# Altium PCB GPSDO.PcbDoc
Units mil, origin at the board's own origin, x right, y up, seen from the top; angles counter-clockwise.
Board outline 1528 x 1869 mil, 2 copper layers (Top Layer, Bottom Layer), stack 12.8 mil thick; 90 components, 59 nets, 321 pads, 180 vias.
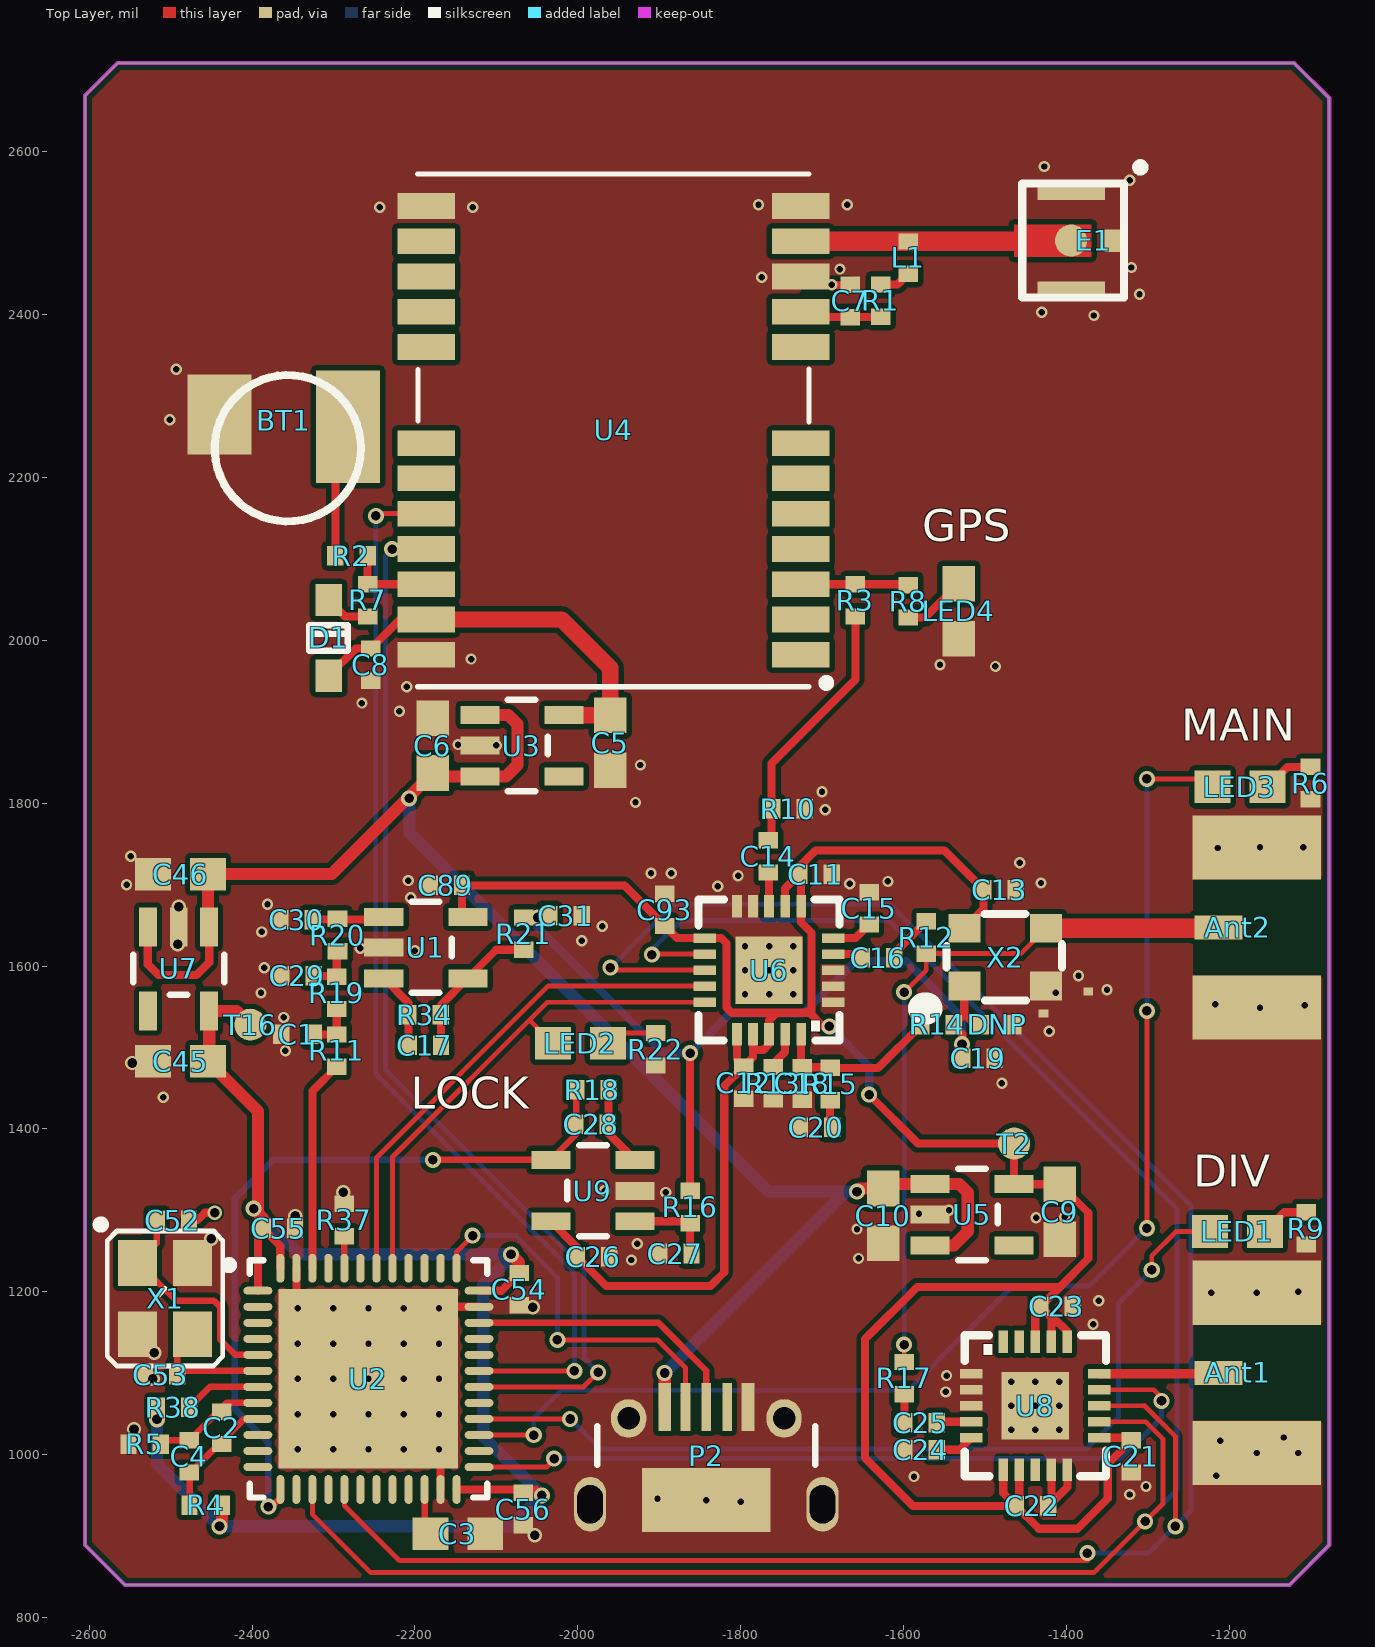
[diagram p0: Top Layer view]
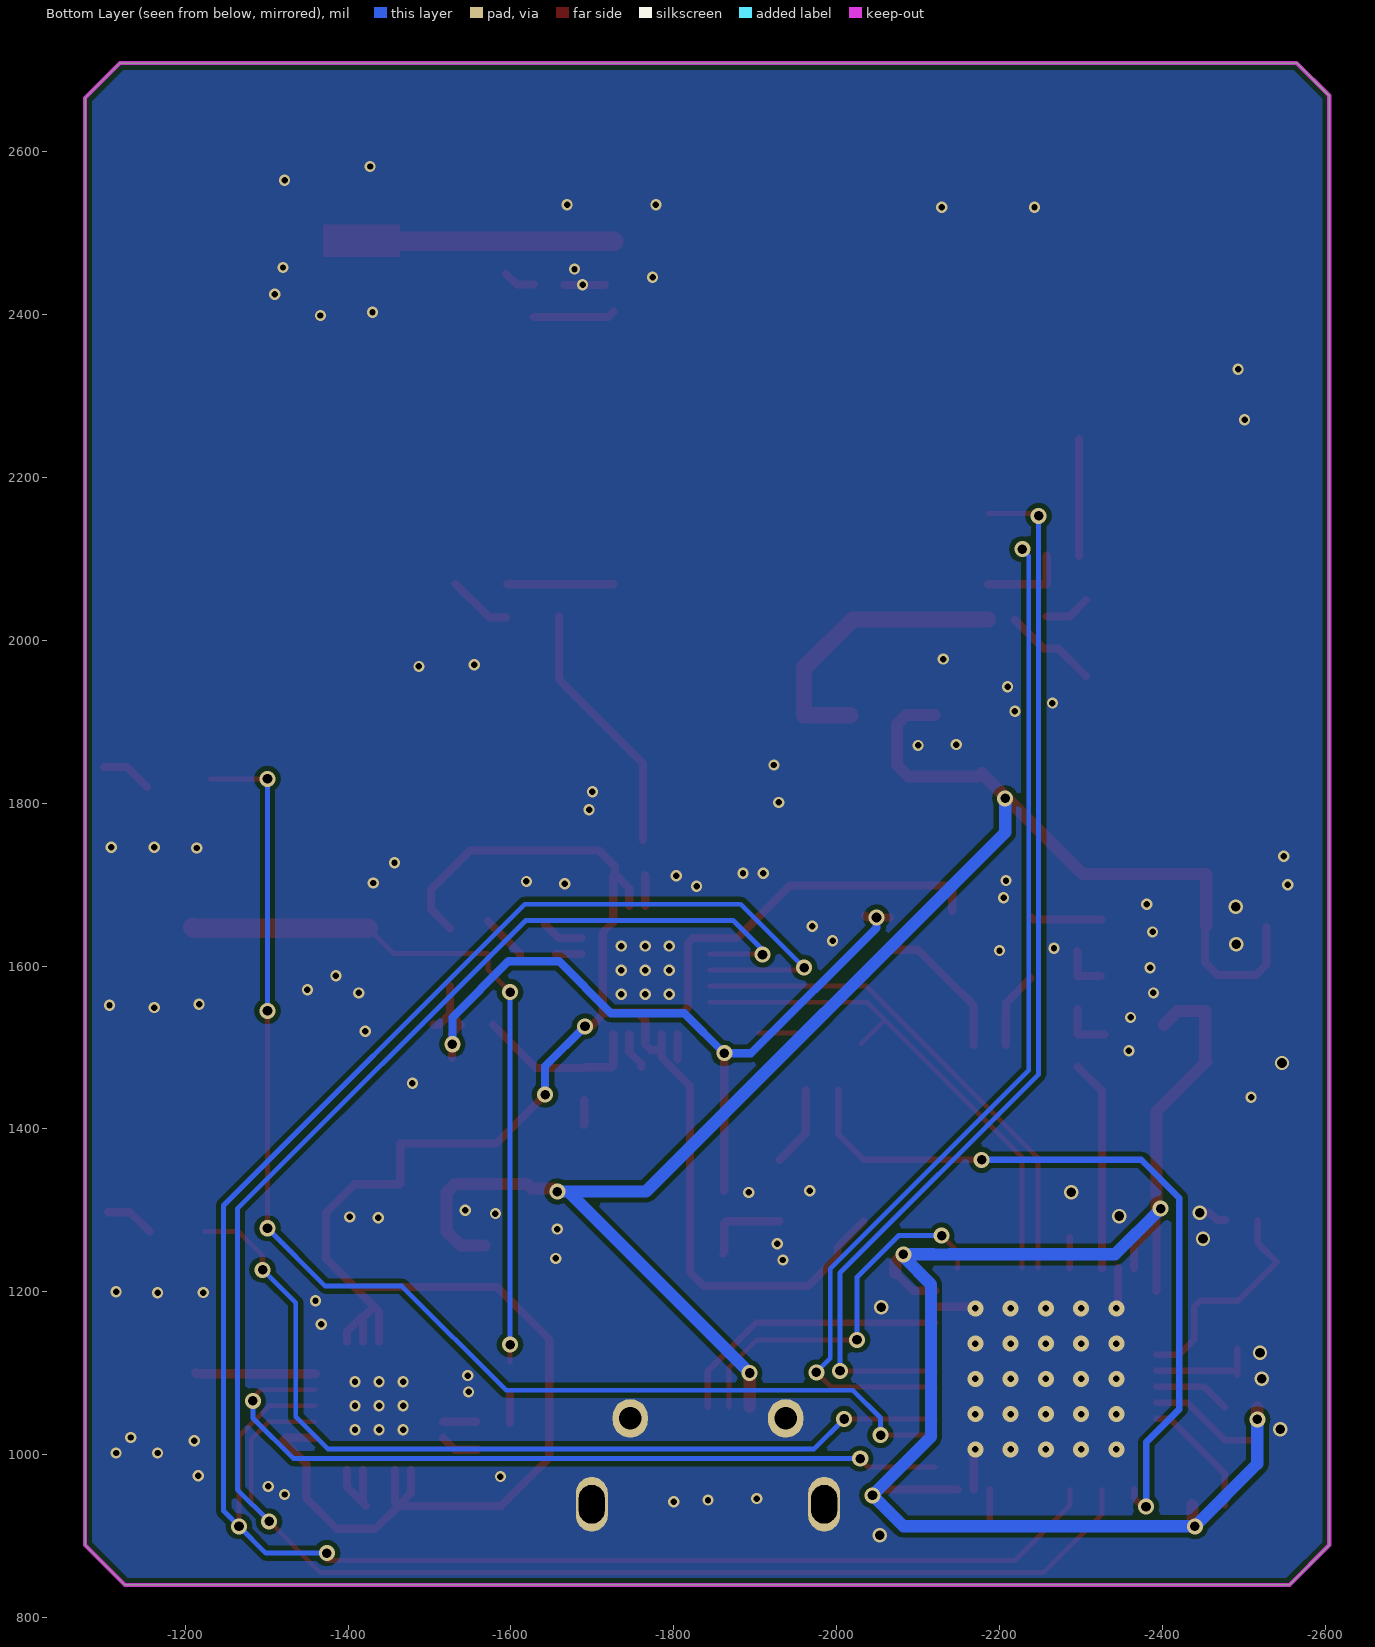
[diagram p1: Bottom Layer view, seen from below]

## Layer stack, top to bottom
Top Solder: solder mask 0.4, Solder Resist, Dk 3.5
Top Layer: signal copper 1.4
Dielectric 1: core 10, FR-4, Dk 4.2
Bottom Layer: signal copper 1.4
Bottom Solder: solder mask 0.4, Solder Resist, Dk 3.5

## Board outline
-2605,889 -2605,2669 -2565,2709 -1120,2709 -1077,2666 -1077,889 -1126,840 -2556,840

## Design rules (kind name [scope] priority, off if disabled: settings)
Clearance Clearance_1 [(InNamedPolygon('Bottom Layer-No Net')) vs Not InNet('GND')] p1: gap=15 ignorepadtopadclearanceinfootprint=FALSE except(0: Arc-Hole Track-Hole SMDPad-Hole THPad-Hole Via-Hole Fill-Hole Poly-Hole Region-Hole Text-Hole)
Clearance [All] p2: gap=6 ignorepadtopadclearanceinfootprint=FALSE
DiffPairsRouting [All] p1: maxlimit=10 minlimit=10 mostfreqgap=10 toplayer_minwidth=5.98 toplayer_maxwidth=15 toplayer_prefwidth=15 bottomlayer_minwidth=5.98 bottomlayer_maxwidth=15 bottomlayer_prefwidth=15 maxuncoupledlength=500
MinimumSolderMaskSliver [All] p1 off: minsoldermaskwidth=10
PlaneClearance [All] p1: clearance=10
PlaneConnect [All] p1: planeconnectstyle=Direct reliefexpansion=20 reliefentries=4 reliefconductorwidth=10 reliefairgap=10
PolygonConnect [All] p1: connectstyle=Direct reliefconductorwidth=10 reliefentries=4 polygonreliefangle="90 Angle" airgapwidth=10
RoomDefinition PLL [InComponentClass('PLL')] p1 off: confinementstyle=ConfineIn formatcopy=TRUE lockcomponents=FALSE outline -5605,-2240 -3605,-2240 -3605,-1240 -5605,-1240
RoomDefinition GPS [InComponentClass('GPS')] p2 off: confinementstyle=ConfineIn formatcopy=TRUE lockcomponents=FALSE outline -1032,897 -146,897 -146,1682 -1032,1682
RoomDefinition MCU [InComponentClass('MCU')] p3 off: confinementstyle=ConfineIn formatcopy=TRUE lockcomponents=FALSE outline -595,900 1750,900 1750,1140 -595,1140
RoutingVias [All] p1: holewidth=12 width=20 viastyle="Through Hole" minholewidth=11.81 minwidth=19.68 maxholewidth=28 maxwidth=50
SilkToBoardRegionClearance [All] p1 off:
SilkToSilkClearance [All] p1 off: silktosilkclearance=10
SilkToSolderMaskClearance [IsPad] p1 off: minsilkscreentomaskgap=10 clearancetoexposedcopper=TRUE
SolderMaskExpansion [All] p1: expansion=4
Width [All] p1: maxlimit=60 minlimit=6 preferedwidth=6
23 further rules are at their usual default settings.

## Classes and differential pairs
component class MCU: C2 C3 C4 C26 C27 C28 C29 C30 C31 C45 C46 C52 C53 C54 C55 C56 C? LED1 LED3 LED4 P2 R4 R5 R6 R9 R16 R18 R19 R20 R21 R22 R28 R37 R38 R? T16 U2 U7 U9 X1
component class GPS: BT1 C5 C6 C7 C8 D1 E1 L1 LED4 R1 R2 R3 R7 R8 U3 U4
component class PLL: Ant1 Ant2 C9 C10 C11 C12 C13 C14 C15 C16 C18 C19 C20 C21 C22 C23 C24 C25 C26 C27 C28 C93 DNP R10 R12 R13 R14 R15 R16 R17 R18 T2 U5 U6 U8 U9 X2

## Components (designator, comment, footprint, x,y, rotation, side; value= is the part's Value field where it differs from the comment)
Ant1 "Antenna" SMA-2 -1166,1002 r90 top
Ant2 "Antenna" SMA-2 -1166,1549 r90 top
BT1 "Battery" XH414H-IV01E -2356,2236 r270 top
C1 "Cap" 0402 -2344,1516 r180 top value=DNC
C2 "Cap" 0402 -2437,1033 r270 top value=0.1uF
C3 "Cap" 0603 -2147,903 r180 top value=4.7uF
C4 "Cap" 0402 -2477,998 r270 top value=0.1uF
C5 "4.7uF" 0603 -1960,1874 r90 top
C6 "4.7uF" 0603 -2178,1871 r270 top
C7 "100pF" 0402 -1665,2417 r270 top
C8 "0.1uF" 0402 -2254,1970 r90 top
C9 "4.7uF" 0603 -1408,1298 r90 top
C10 "4.7uF" 0603 -1625,1293 r90 top
C11 "100pF" 0402 -1708,1713 r0 top
C12 "100pF" 0402 -1796,1457 r270 top
C13 "100pF" 0402 -1482,1694 r0 top
C14 "100pF" 0402 -1766,1735 r270 top
C15 "100pF" 0402 -1642,1671 r270 top
C16 "100pF" 0402 -1631,1610 r180 top
C17 "Cap" 0402 -2188,1503 r0 top value=0.1uF
C18 "100pF" 0402 -1724,1456 r270 top
C19 "100pF" 0402 -1508,1487 r0 top
C20 "100pF" 0402 -1707,1402 r180 top
C21 "100pF" 0402 -1320,998 r270 top
C22 "100pF" 0402 -1442,937 r0 top
C23 "100pF" 0402 -1412,1182 r0 top
C24 "100pF" 0402 -1579,1006 r0 top
C25 "100pF" 0402 -1579,1039 r0 top
C26 "Cap" 0402 -1981,1243 r180 top value=0.1uF
C27 "Cap" 0402 -1880,1247 r180 top value=DNC
C28 "Cap" 0402 -1983,1406 r180 top value=0.1uF
C29 "Cap" 0402 -2344,1588 r180 top value=DNC
C30 "Cap" 0402 -2345,1657 r180 top value=DNC
C31 "Cap" 0402 -2015,1662 r0 top value=DNC
C45 "4.7uF" 0603 -2488,1483 r0 top
C46 "4.7uF" 0603 -2488,1713 r0 top
C52 "Cap" 0402 -2497,1288 r180 top value=20pF
C53 "Cap" 0402 -2512,1098 r0 top value=20pF
C54 "Cap" 0402 -2072,1203 r90 top value=0.1uF
C55 "Cap" 0402 -2367,1278 r180 top value=0.1uF
C56 "Cap" 0402 -2067,933 r90 top value=0.1uF
C89 "Cap" 0402 -2162,1699 r0 top value=0.1uF
C93 "0.1uF" 0402 -1893,1669 r90 top
D1 "Diode" LC-SOD-323 -2306,2003 r270 top
DNP "DNC" 0402 -1485,1528 r0 top value=0Ohm
E1 "Antenna" IPEX -1394,2491 r270 top
L1 "10nH" 0402 -1594,2470 r90 top value=10mH
LED1 "LED0" 0603 -1190,1274 r0 top
LED2 "LED0" 0603 -1997,1505 r0 top
LED3 "LED0" 0603 -1187,1820 r0 top
LED4 "LED0" 0603 -1532,2036 r270 top
P2 "SWD_MicroUSB" MICRO-YZX -1842,828 r0 top
R1 "33R" 0402 -1628,2417 r90 top
R2 "" 0402 -2278,2104 r0 top value=0R
R3 "50R" 0402 -1659,2049 r90 top
R4 "0R/FB" 0402 -2457,938 r0 top
R5 "0R/FB" 0402 -2532,1013 r0 top
R6 "10k" 0402 -1100,1825 r270 top value=0Ohm
R7 "" 0402 -2258,2049 r90 top value=0R
R8 "" 0402 -1594,2048 r270 top value=0R
R9 "10k" 0402 -1105,1278 r270 top value=0Ohm
R10 "50R" 0402 -1741,1793 r180 top
R11 "Res2" 0402 -2296,1496.32 r270 top value=10k
R12 "1k" 0402 -1572,1635 r90 top
R13 "4.7k" 0402 -1760,1456 r90 top
R14 "10k" 0402 -1558,1528 r180 top
R15 "10k" 0402 -1690,1455 r90 top
R16 "Res2" 0402 -1862,1304 r90 top value=10k
R17 "1k" 0402 -1599,1094 r270 top
R18 "Res2" 0402 -1982,1448 r0 top value=10k
R19 "Res2" 0402 -2296,1567.32 r270 top value=10k
R20 "Res2" 0402 -2295,1638.32 r270 top value=10k
R21 "Res2" 0402 -2066,1640 r270 top value=10k
R22 "10k" 0402 -1904,1498 r270 top value=0Ohm
R34 "Res2" 0402 -2188,1540 r180 top value=10k
R37 "Res2" 0402 -2287,1288 r90 top value=10k
R38 "Res2" 0402 -2497,1058 r0 top value=10k
T2 "TestPad" "TestPad - 1mm" -1464,1382 r270 top
T16 "TestPad" "TestPad - 1mm" -2402,1528 r180 top
U1 "OP-SOT23" SOT23-5 -2187,1623 r270 top
U2 "STM32F401CCU6" STM-UFQFPN48_N -2257,1093 r0 top
U3 "LP5907" SOT23-5 -2069,1871 r270 top
U4 "NEO-M8" NEO -1956,2258 r0 top
U5 "LP5907" SOT23-5 -1516,1295 r270 top
U6 "ADF4001" ADF4001 -1765,1595 r180 top
U7 "LP5907" SOT23-5 -2490,1597 r180 top
U8 "ADF4001" ADF4001 -1438,1060 r0 top
U9 "OP-SOT23" SOT23-5 -1981,1324 r90 top
X1 "24.000 KHz 3.2x2.5mm 8-10pf" OSCILLATOR-3.2X2.5 -2507,1192 r270 top
X2 "OSC_40M" TXC_7Q -1475,1611 r0 top

## Footprints (in the part's own frame and the unit in brackets; to place one, negate y for a bottom-side part, rotate by r counter-clockwise, add the part's x,y. Pads: shape width x height; smd on the part's side, far side on the other; paste and mask are expansions set on the pad)
0402 [mil] "0402-RES"
  rect 20x24 smd: 1(-19.68,0) 2(20,0)
0603 [mil] "0603-RES"
  rect 44x40 smd: 1(-33.46,0) 2(34,0)
ADF4001 [mm]
  rect 2.1x2.1 smd: 0(0,0)
  rect 0.7x0.3 smd: 1(-2,1) 2(-2,0.5) 3(-2,0) 4(-2,-0.5) 5(-2,-1) 11(2,-1) 12(2,-0.5) 13(2,0) 14(2,0.5) 15(2,1)
  rect 0.3x0.7 smd: 6(-1,-2) 7(-0.5,-2) 8(0,-2) 9(0.5,-2) 10(1,-2) 16(1,2) 17(0.5,2) 18(0,2) 19(-0.5,2) 20(-1,2)
  silkscreen extent -2.2,-2.2 2.2,2.2, body extent -2,-2 2,2, height 0.65
IPEX [mm]
  round 1 smd: 1(0,0)
  rect 0.5x2.1 smd: 2(-1.524,0) 2(1.524,0)
  rect 0.7x0.7 smd: 2(0,1.397)
  Top Layer region: -0.508,-1.778 0.508,-1.778 0.508,0.635 -0.508,0.635
  silkscreen extent -2.41,-1.52 1.78,2.29
LC-SOD-323 [mm]
  rect 1x0.83 smd: 1(1.18,0) 2(-1.18,0)
  silkscreen extent -0.4,-0.6 0.4,0.6, body extent -1.35,-0.62 1.35,0.63, height 1.1
MICRO-YZX [mm]
  rect 0.4x1.5 smd: 1(-1.3,5.85) 5(1.3,5.85)
  rect 0.3x1.5 smd: 2(-0.65,5.85) 3(0,5.85) 4(0.65,5.85)
  oval 1x1.7 hole 0.8 slot 1.2 at 90 deg: 5(-3.625,2.82) 5(3.625,2.82)
  oval 1.1x1.2 hole 0.7: 5(-2.425,5.5) 5(2.425,5.5)
  rect 4x2 smd: 5(0,2.95)
  silkscreen extent -3.4,4.05 3.4,5.25, body extent -4.02,0.33 3.98,5.93, height 2.6
NEO [mm] "u-blox NEO GNSS module"
  rect 1.8x0.8 smd paste-0.1: 1(5.842,-7) 2(5.842,-5.9) 3(5.842,-4.8) 4(5.842,-3.7) 5(5.842,-2.6) 6(5.842,-1.5) 7(5.842,-0.4) 8(5.842,2.6) 9(5.842,3.7) 10(5.842,4.8) 11(5.842,5.9) 12(5.842,7) 13(-5.842,7) 14(-5.842,5.9) 15(-5.842,4.8) 16(-5.842,3.7) 17(-5.842,2.6) 18(-5.842,-0.4) 19(-5.842,-1.5) 20(-5.842,-2.6) 21(-5.842,-3.7) 22(-5.842,-4.8) 23(-5.842,-5.9) 24(-5.842,-7)
  silkscreen extent -6.11,-8 6.69,8, body extent -6.1,-8 6.1,8, height 2.28
OSCILLATOR-3.2X2.5 [mil] "OSCILLATOR-3.2X2.5"
  rect 56x48 smd: 1(-43.31,-33.46) 2(44,-33.46) 3(44,34) 4(-43.31,34)
  silkscreen extent -95,-83 83,71
SMA-2 [mm]
  rect 0.75x1.5 smd: 1(2.5,1.2)
  rect 2x4 smd: GND(0,0) GND(5,0)
  Top Layer pour cut-out: 1,2 4,2 4,-2 1,-2
SOT23-5 [mil] "SOT23-5"
  rect 22x48 smd: 1(-37.4,-51.19) 2(0,-51.19) 3(38,-51.19) 4(38,52) 5(-37.4,52)
  silkscreen extent -56,-17 56,32
STM-UFQFPN48_N [mm] "QFN, 48-Leads, Body 7.1x7.1mm, Pitch 0.5mm, Thermal Pad 5.6x5.6mm, IPC Medium Density"
  oval 0.9x0.25 smd: 1(-3.45,2.75) 2(-3.45,2.25) 3(-3.45,1.75) 4(-3.45,1.25) 5(-3.45,0.75) 6(-3.45,0.25) 7(-3.45,-0.25) 8(-3.45,-0.75) 9(-3.45,-1.25) 10(-3.45,-1.75) 11(-3.45,-2.25) 12(-3.45,-2.75) 25(3.45,-2.75) 26(3.45,-2.25) 27(3.45,-1.75) 28(3.45,-1.25) 29(3.45,-0.75) 30(3.45,-0.25) 31(3.45,0.25) 32(3.45,0.75) 33(3.45,1.25) 34(3.45,1.75) 35(3.45,2.25) 36(3.45,2.75)
  oval 0.25x0.9 smd: 13(-2.75,-3.45) 14(-2.25,-3.45) 15(-1.75,-3.45) 16(-1.25,-3.45) 17(-0.75,-3.45) 18(-0.25,-3.45) 19(0.25,-3.45) 20(0.75,-3.45) 21(1.25,-3.45) 22(1.75,-3.45) 23(2.25,-3.45) 24(2.75,-3.45) 37(2.75,3.45) 38(2.25,3.45) 39(1.75,3.45) 40(1.25,3.45) 41(0.75,3.45) 42(0.25,3.45) 43(-0.25,3.45) 44(-0.75,3.45) 45(-1.25,3.45) 46(-1.75,3.45) 47(-2.25,3.45) 48(-2.75,3.45)
  rect 5.6x5.6 smd: 49(0,0)
  silkscreen extent -4.47,-3.7 3.7,3.7, body extent -3.55,-3.55 3.55,3.55, height 0.6
"TestPad - 1mm" [mm]
  round 1 smd: 1(0,0)
TXC_7Q [mm]
  rect 1x0.9 smd: 1(-1.275,-0.9) 2(1.275,-0.9) 3(1.275,0.9) 4(-1.275,0.9)
  silkscreen extent -2.52,-1.6 1.78,1.35
XH414H-IV01E [mm]
  rect 3.5x2 smd: 1(-0.671,1.873)
  rect 2.5x2 smd: 2(-1.052,-2.127)
  silkscreen extent -2.28,-2.28 2.28,2.28, body extent -2.42,-2.4 2.36,2.4, height 2

## Part data
BT1: "Multicell Battery", LatestRevisionDate=17-Jul-2002, LatestRevisionNote="Re-released for DXP Platform.", PackageDescription="Battery; 2 Leads", PackageReference=BAT-2, Published=24-Mar-1999, Publisher="Altium Limited"
C1 C2 C3 C4 C17 C26 C27 C28 C29 C30 C31 C52 C53 C54 C55 C56 C89: "Capacitor", LatestRevisionDate=17-Jul-2002, LatestRevisionNote="Re-released for DXP Platform.", PackageDescription="Radial Cap, Thru-Hole; 2 Leads; 0.3 in Pin Spacing", PackageReference=RAD-0.3, Published=8-Jun-2000, Publisher="Altium Limited"
C5 C6 C7 C8 C9 C10 C11 C12 C13 C14 C15 C16 C18 C19 C20 C21 C22 C23 C24 C25 C45 C46: library part Cap, "Capacitor", LatestRevisionDate=17-Jul-2002, LatestRevisionNote="Re-released for DXP Platform.", PackageDescription="Radial Cap, Thru-Hole; 2 Leads; 0.3 in Pin Spacing", PackageReference=RAD-0.3, Published=8-Jun-2000, Publisher="Altium Limited"
C93: library part CAP0402-CAP, "<b>Capacitor</b> / Standard 0603 ceramic capacitor, and 0.1\" leaded capacitor.", PARTNO=CC0402ZRY5V7BB104
D1: "Default Diode", Code_JEDEC=DO-214-AB, LatestRevisionDate=17-Jul-2002, LatestRevisionNote="Re-released for DXP Platform.", PackageDescription="DO-214-AB/SMC; 2 C-Bend Leads; Body 7.9 x 5.9 mm, inc. leads (LxW)", PackageReference=SMC, PackageVersion=Sep-1996, Published=8-Jun-2000, Publisher="Altium Limited"
DNP R1 R2 R3 R4 R5 R6 R7 R8 R9 R10 R12 R13 R14 R15 R17 R22: library part Res2, "Resistor", LatestRevisionDate=17-Jul-2002, LatestRevisionNote="Re-released for DXP Platform.", PackageDescription="Axial Device, Thru-Hole; 2 Leads; 0.4 in Pin Spacing", PackageReference=AXIAL-0.4, Published=8-Jun-2000, Publisher="Altium Limited"
E1: "Generic Antenna", LatestRevisionDate=17-Jul-2002, LatestRevisionNote="Re-released for DXP Platform.", PackageReference=PIN1, Published=24-Mar-1999, Publisher="Altium Limited"
L1: library part Inductor, "Inductor", Code_IEC=1005, Code_JEITA=0402, LatestRevisionDate=29-May-2009, LatestRevisionNote="IPC-7351 Footprint Added.", PackageDescription="Chip Inductor", PackageReference=0402-A, Published=8-Jun-2000, Publisher="Altium Limited"
LED1 LED2 LED3 LED4: "Typical INFRARED GaAs LED", LatestRevisionDate=08-Jul-2005, LatestRevisionNote="Mech Layer 1 removed.", PackageDescription="LED; 2 Leads", PackageReference=LED-0, Published=8-Jun-2000, Publisher="Altium Limited"
P2: "Connector SMD USB Micro Type B middle mount", Manufacturer 1="Molex Inc", Package / Case=SMD, Supplier Part Number 1=WM17142CT-ND, SCDType=undef, Supplier 1=Digi-Key
R11 R16 R18 R19 R20 R21 R34 R37 R38: "Resistor", LatestRevisionDate=17-Jul-2002, LatestRevisionNote="Re-released for DXP Platform.", PackageDescription="Axial Device, Thru-Hole; 2 Leads; 0.4 in Pin Spacing", PackageReference=AXIAL-0.4, Published=8-Jun-2000, Publisher="Altium Limited"
U2: "ARM Cortex-M4 32-bit MCU+FPU, 105 DMIPS, 256 kB Flash, 64 kB Internal RAM, 36 I/Os, 48-pin UFQFPN, -40 to 85 degC, Tray", I/Os (High Current)=36, Manufacturer=STMicroelectronics, Operating Frequency(F) (Processor speed) (MHz)=84, Supplier Part Number 1=19X6217, Supply Voltage(Vcc) max (V)=3.6, Supply Voltage(Vcc) min (V)=1.8, ComponentLink1Description="Manufacturer URL", ComponentLink1URL=http://www.st.com/web/en/home.html, ComponentLink2Description=Datasheet, ComponentLink2URL=http://www.st.com/st-web-ui/static/active/en/resource/technical/document/data_brief/DM00071938.pdf, ComponentLink3Description="Package Specification", ComponentLink3URL=http://www.st.com/st-web-ui/static/active/en/resource/technical/document/data_brief/DM00071938.pdf, Core="ARM Cortex-M4", DatasheetVersion="Rev. 1", FLASH Size (Prog) (kB)=256, Internal RAM Size (kB)=64, Mounting Technology="Surface Mount", PackageDescription="48-Pin Ultra Thin Fine Pitch Quad Flat No-Lead, 7 x 7 x 0.6 mm Body, 0.5 mm Pitch, Exposed Pad", PackageReference=UFQFPN48, PackageVersion="Rev. 1, 04/2013", Packing=Tray, PartNumber=STM32F401CCU6, Supplier 1=Newark, Supplier 2=Mouser, Supplier Part Number 2=511-STM32F401CCU6
U4: library part NEO, "u-blox NEO GNSS module", Manufacturer=u-blox, Part Description="u-blox GNSS module"
X1: library part OSCILLATOR-3.2X2.5, "Crystal Oscillator in 3.2x2.5 SMD"

## Free pads (board coordinates)
  rect 11.81x9.84 smd: 2(-1162,1549) 3(-1107,1552) 4(-1217,1553) 5(-1428,1542) 6(-1373,1569)

## Via types
v1: diameter 13.78, hole 7.87, Top Layer to Bottom Layer, 107 vias
v2: diameter 19.68, hole 11.81, Top Layer to Bottom Layer, 36 vias
v3: diameter 19.68, hole 7.87, Top Layer to Bottom Layer, 25 vias
v4: diameter 17.72, hole 11.81, Top Layer to Bottom Layer, 12 vias

## Nets (pads, with @x,y where several pads share a name; then routed paths per layer and width w, separated by ;. In a path a pad name is that pad's centre, name@x,y a point inside that pad or via, vN(x,y) a via of type N, cw(c..) or ccw(c..) an arc to the next point about the centre after c; other vN are vias at no path point)
3.3D: C45.2 C54.2 C55.2 C56.2 R4.2 R38.1 T16.1 U2.1 U2.24 U2.36 U2.48 U7.5 | length 2001.2
  Top Layer w10: U2.1 v2@-2392.83,1296.83 ; C55.2 -2365.27,1256.27 U2.48 ; U2.24 -2051.17,957.17 v2(-2044,950) ; U2.36 -2093.73,1201.27 C54.2
  Top Layer w15: v2(-2516.68,1043.32) R38.1 ; C45.2 -2392.83,1421.83 v2@-2392.83,1296.83 ; C45.2@-2452.6,1484.4 U7.5 -2419,1545 T16.1 ; v2(-2440,912) -2437,915 R4.2 ; v2(-2398,1302) v2@-2392.83,1296.83 ; C55.2 -2387,1291 v2@-2392.83,1296.83 ; v2(-2082,1246) -2072,1236 C54.2
  Bottom Layer w15: v2(-2516.68,1043.32) -2516.68,988.68 v2(-2440,912) -2082,912 v2(-2044,950) -2116,1022 -2116,1209 -2082,1243 v2(-2082,1246) -2118.99,1246 -2119.33,1245.66 -2138.67,1245.66 -2139.01,1246 -2342,1246 v2(-2398,1302)
3.3GPS: C5.2 C8.2 D1.1 U3.5 U4.23 | length 481.7
  Top Layer w10: D1.1 -2272.54,1990 C8.2 U4.23@-2218.28,2025.72
  Top Layer w20: U4.23 -2019.72,2025.72 -1960,1966 C5.2 U3.5@-2016.6,1908
3.3PLL: C9.2 C11.1 C12.1 C13.1 C21.1 C22.1 C23.1 C26.2 C89.2 C93.1 T2.1 U1.5 U5.5 U6.6 U6.7 U6.11 U6.16 U6.17 U6.18 U8.6 U8.7 U8.11 U8.16 U8.17 U8.18 U9.5 X2.4 | length 3516.3
  Top Layer w10: U1.5@-2142,1667.4 C89.2 -1942.68,1699 C93.1 -1878.06,1634.37 U6.11 -1823.71,1634.37 -1817.34,1628 -1817.34,1549.11 -1810.89,1542.66 -1755.34,1542.66 ; U9.5 -2001,1254.6 C26.2 -1965,1207 -1837,1207 -1820,1224 -1820,1452.68 C12.1 -1784.68,1488 U6.17 ; C12.1@-1804.37,1485.06 U6.16 ; -1783.68,1497 -1772,1497 -1765,1504 U6.18 -1765,1533 -1755.34,1542.66 ; U6.7 -1745.32,1695.37 C11.1 ; v2(-1691,1526) -1698.44,1526 -1717.11,1544.66 ; v2(-1642,1442) -1582,1382 T2.1 U5.5 -1463.6,1332 C9.2 -1373,1297 -1373,1240.68 -1407.69,1206 ; X2.4 -1501.69,1669.95 C13.1 -1549.68,1742 -1708,1742 -1727.68,1722.32 C11.1 ; U8.6 -1477.37,952.69 C22.1 ; C22.1@-1457.69,941 U8.7 ; U8.18 -1438,1175.68 C23.1 ; U8.17 -1418.31,1168.63 C23.1 ; -1416.19,1168.63 -1398.63,1151.07 U8.16 ; U8.11 C21.1@-1322.94,1020.63 ; C21.1 -1349,988.68 -1349,946 -1386,909 -1433.69,909 C22.1 ; -1755.34,1542.66 -1719.11,1542.66 -1717.11,1544.66 ; C11.1 -1725.63,1710.94 U6.6 -1725.63,1653.86 -1712.66,1640.89 -1712.66,1544.66 -1717.11,1544.66 ; C22.1 -1588,937 -1647,996 -1647,1142 -1583,1206 -1407.69,1206 ; C23.1 -1407.69,1206
  Bottom Layer w10: v2(-1691,1526) -1642,1477 v2(-1642,1442)
5V: C6.2 C10.2 C46.2 P2.1 U3.1 U3.3 U5.1 U5.3 U7.1 U7.3 | length 2151.7
  Top Layer w10: U7.3 -2528,1602 -2515,1589 -2468,1589 -2452.6,1604.4 U7.1
  Top Layer w15: U7.1@-2454,1649.59 C46.2 -2302,1713 C6.2 ; C6.2@-2174,1833 U3.3 -2088,1833 -2074,1847 -2074,1897 -2085.4,1908.4 U3.1 ; P2.1 v2(-1893.18,1100.18) ; v2(-1657,1323) -1653,1327 C10.2 -1619.6,1332.4 U5.1 -1531.4,1332.4 -1521,1322 -1521,1274 -1538,1257 U5.3
  Bottom Layer w15: v2(-2207,1806) -2207,1764 -1766,1323 -1670.36,1323 ; v2(-1893.18,1100.18) -1670.36,1323 ; v2(-1657,1323) -1670.36,1323
AGND: C2.1 C4.1 R5.2 U2.8 | length 133.5
  Top Layer w8: R5.2@-2507.32,1017.68 C4.1 -2431.21,1063.47 U2.8
CLOCK40M: Ant2.1 R12.1 R17.1 X2.3 | length 888.9
  Top Layer w6: R17.1 v2(-1599,1135) ; v2(-1599,1568) -1572,1595 R12.1 -1455.92,1615.32 X2.3
  Top Layer w24: X2.3 -1210.24,1646.43 Ant2.1@-1209.24,1647.43
  Bottom Layer w6: v2(-1599,1135) v2(-1599,1568)
GND: Ant1.GND Ant2.GND BT1.2 C1.2 C3.1 C5.1 C6.1 C7.1 C8.1 C9.1 C10.1 C11.2 C12.2 C13.2 C15.1 C18.2 C19.2 C20.2 C21.2 C22.2 C23.2 C24.1 C26.1 C27.2 C29.2 C30.2 C31.2 C45.1 C46.1 C52.1 C53.1 C54.1 C55.1 C56.1 C89.1 C93.2 DNP.2 E1.2 LED4.2 P2.5 pad.2 pad.3 pad.4 pad.5 pad.6 R5.1 R6.2 R9.2 R10.1 R13.1 R22.2 R37.2 U1.2 U2.23 U2.35 U2.47 U2.49 U3.2 U4.10 U4.12 U4.13 U4.24 U5.2 U6.0 U6.1 U6.2 U6.3 U6.9 U6.10 U7.2 U8.0 U8.1 U8.2 U8.3 U8.9 U8.10 U9.2 X1.2 X1.4 X2.2 | length 322
  Top Layer w10: C52.1 -2467,1288 -2458,1297 v4(-2446,1297) ; U2.49@-2345.58,1181.58 U2.47 ; U2.23 U2.49@-2168.42,1004.42 ; U2.49@-2168.42,1181.58 U2.35 ; U4.10@-1715.71,2436.69 C7.1 ; C22.2 C22.2@-1418.31,940.68 ; U8.9 C22.2@-1418.31,940.68 ; U8.10 -1398.63,960.37 C22.2@-1418.31,940.68
  other v1: -1800,942 -1842,944.14 -1902,946 -1322,951 -1302,961 -1587,973 -1216,974 -1166,1002 -1115,1002 -1211,1017 -1133,1021 -1467.53,1030.47 -1438,1030.47 -1408.47,1030.47 -1467.53,1060 -1438,1060 -1408.47,1060 -1548,1077 -1467.53,1089.53 -1438,1089.53 -1408.47,1089.53 -1547,1097 -1367,1160 -1360,1189 -1222,1199 -1166,1198.85 -1115,1200 -1934,1239 -1655,1241 -1927,1259 -1657,1277 -1437,1291 -1402,1292 -1580.86,1296 -1544,1300 -1892,1322 -1967,1324 -2509,1439 -1479,1456 -2359,1496 -1421,1520 -2361,1537 -1162,1549 -1107,1552 -1217,1553 -1794.53,1565.47 -1765,1565.47 -1735.47,1565.47 -2389,1567 -1413,1567 -1350,1571 -1385,1588 -1794.53,1595 -1765,1595 -1735.47,1595 -2385,1598 -2200,1619 -2267,1622 -1794.53,1624.53 -1765,1624.53 -1735.47,1624.53 -1995,1631 -2388,1642 -1970,1649 -2381,1676 -2205,1684 -1828,1698 -2554,1700 -1666,1701 -1431,1702 -1619,1704 -2208,1705 -1803,1711 -1910,1714 -1885,1714 -1457,1727 -2549,1735 -1214,1745 -1162,1745.85 -1109,1746 -1696,1792 -1929,1801 -1700,1814 -1923,1847 -2100,1871 -2147,1872 -2219,1913 -2265,1923 -2210,1943 -1487,1968 -1555,1970 -2131,1977 -2501,2271 -2493,2333 -1366,2399 -1430,2403 -1310,2425 -1688,2436.69 -1774,2446 -1678,2456 -1320,2458 -2243,2532 -2129,2532 -1778,2535 -1669,2535 -1322,2565 -1427,2582
  other v3: -2343.61,1006.39 -2300.31,1006.39 -2257,1006.39 -2213.69,1006.39 -2170.39,1006.39 -2343.61,1049.69 -2300.31,1049.69 -2257,1049.69 -2213.69,1049.69 -2170.39,1049.69 -2343.61,1093 -2300.31,1093 -2257,1093 -2213.69,1093 -2170.39,1093 -2343.61,1136.31 -2300.31,1136.31 -2257,1136.31 -2213.69,1136.31 -2170.39,1136.31 -2343.61,1179.61 -2300.31,1179.61 -2257,1179.61 -2213.69,1179.61 -2170.39,1179.61
  other v4: -2053,901 -2545,1031 -2522,1093 -2520,1125 -2055,1181 -2450,1265 -2347,1293 -2288,1322 -2547,1481 -2491,1627 -2490,1673
LED: LED3.1 U2.27 | length 1560.3
  Top Layer w6: U2.27 -2121.07,1024 v2(-2054,1024) ; v2(-1301,1278) v2(-1301,1545) ; v2(-1301,1830) LED3.1@-1230.46,1830
  Bottom Layer w6: v2(-2054,1024) -2054,1045 -2020,1079 -1594,1079 -1466,1207 -1372,1207 v2(-1301,1278) ; v2(-1301,1545) v2(-1301,1830)
LED1: LED1.1 U2.28 | length 1115.5
  Top Layer w6: U2.28 v2(-2009.21,1043.79) ; v2(-1295,1227) -1295,1244 -1265,1274 LED1.1
  Bottom Layer w6: v2(-2009.21,1043.79) -1972.43,1007 -1375,1007 -1335.63,1046.37 -1335.63,1186.37 v2(-1295,1227)
NetAnt1_1: Ant1.1 U8.15 | length 146.5
  Top Layer w12: U8.15 -1214.3,1099.37 Ant1.1
NetBT1_1: BT1.1 R2.1 | length 143
  Top Layer w10: R2.1 BT1.1@-2297.68,2247.01
NetC1_1: C1.1 R11.1 R19.2 | length 64.3
  Top Layer w10: C1.1@-2329,1516 R11.1 R19.2
NetC2_2: C2.2 C4.2 R4.1 U2.9 | length 150.4
  Top Layer w8: R4.1 -2476.68,976.86 -2409.76,1043.79 U2.9
NetC3_2: C3.2 U2.22 | length 47.1
  Top Layer w8: C3.2@-2188.1,910.1 U2.22
NetC7_2: C7.2 R1.1 U4.9 | length 100.6
  Top Layer w10: U4.9 -1719.65,2397.31 R1.1
NetC14_1: C14.1 R3.1 R10.2 | length 317.3
  Top Layer w10: C14.1@-1762,1754.68 -1762,1849 -1659,1952 R3.1
NetC14_2: C14.2 U6.8 | length 38.3
  Top Layer w10: U6.8 C14.2@-1765,1712
NetC15_2: C15.2 U6.5 | length 51.1
  Top Layer w10: U6.5 -1658.63,1634.37 C15.2
NetC16_1: C16.1 R12.2 | length 61.3
  Top Layer w10: C16.1 -1611.32,1615.68 R12.2
NetC16_2: C16.2 U6.4 | length 30.6
  Top Layer w10: U6.4 C16.2@-1655.68,1614.68
NetC17_1: C17.1 R34.2 U1.3 | length 94.6
  Top Layer w10: U1.3 -2208,1554.81 R34.2 -2207.68,1539.68 C17.1
NetC17_2: C17.2 R21.2 R34.1 U1.4 | length 179.2
  Top Layer w10: C17.2 -2168,1552 U1.4 -2100,1620 R21.2
NetC18_1: C18.1 R14.2 R15.2 U6.20 | length 209.5
  Top Layer w10: U6.20 -1725.63,1477.31 C18.1 -1690.68,1475.68 R15.2 -1631,1475 R14.2
NetC19_1: C19.1 C31.1 DNP.1 R14.1 R16.2 R21.1 X2.1 | length 1031.5
  Top Layer w10: R21.1 v2(-2049,1659.68) -2037,1659.68 C31.1 ; R16.2 v2(-1862,1493) ; C19.1 -1527.68,1517.37 R14.1 -1525.2,1541.12 ; X2.1 -1525.2,1541.12 ; DNP.1 -1512.08,1528 -1525.2,1541.12
  Bottom Layer w10: v2(-2049,1659.68) -2049,1647 -1895,1493 v2(-1862,1493) -1813,1542 -1723,1542 -1659,1606 -1597,1606 -1528,1537 v2(-1528,1504)
NetC20_1: C20.1 R15.1 | length 30.6
  Top Layer w10: C20.1@-1690,1404.68 R15.1
NetC24_2: C24.2 U8.5 | length 48.3
  Top Layer w10: C24.2 -1531.37,1006 U8.5
NetC25_1: C25.1 R17.2 | length 34.7
  Top Layer w10: C25.1 R17.2@-1598.68,1073.68
NetC25_2: C25.2 U8.4 | length 40.9
  Top Layer w10: C25.2@-1557.68,1040.32 U8.4
NetC27_1: C27.1 R16.1 U9.1 | length 106.8
  Top Layer w10: U9.1 -1864.28,1286.6 R16.1 -1862,1248.68 C27.1
NetC28_1: C28.1 R18.2 U9.3 | length 99.3
  Top Layer w10: R18.2 -1962,1394.19 U9.3
NetC28_2: C28.2 R18.1 U2.13 U9.4 | length 937.7
  Top Layer w8: v2(-2380,936) -2380,932 -2365.27,946.73 U2.13 ; v2(-2178,1362) U9.4 -2001.68,1393.32 R18.1
  Bottom Layer w8: v2(-2380,936) -2380,1015 -2421,1056 -2421,1315 -2374,1362 v2(-2178,1362)
NetC29_1: C29.1 R19.1 R20.2 | length 60.5
  Top Layer w10: C29.1 -2297,1588 R19.1 -2296,1617.32 R20.2
NetC30_1: C30.1 R20.1 U1.1 | length 88.5
  Top Layer w10: C30.1 -2241.59,1657 U1.1
NetC52_2: C52.2 U2.5 X1.1 | length 279.7
  Top Layer w8: C52.2 -2517,1259.77 -2540.46,1236.31 -2493.16,1189 -2446.86,1189 -2439,1181.14 -2439,1141 -2420.53,1122.53 U2.5
NetC53_2: C53.2 U2.6 X1.3 | length 126.3
  Top Layer w8: C53.2 X1.3@-2492,1130 ; C53.2@-2487.16,1102.84 U2.6
NetD1_2: D1.2 R7.1 | length 56.3
  Top Layer w10: D1.2 -2285.86,2029.31 R7.1
NetE1_1: E1.1 L1.2 U4.11 | length 331.3
  Top Layer w24: U4.11 E1.1@-1394.72,2490.28
NetL1_1: L1.1 R1.2 | length 39.5
  Top Layer w10: R1.2 -1607.32,2437 L1.1
NetLED1_2: LED1.2 R9.1 | length 60.8
  Top Layer w10: LED1.2 -1132.31,1297.68 R9.1
NetLED2_1: LED2.1 U2.41 U6.15 | length 639.5
  Top Layer w6: U2.41 -2227.47,1365.53 -2037.37,1555.63 U6.15 ; -2058.96,1533.5 LED2.1
NetLED2_2: LED2.2 R22.1 | length 46.3
  Top Layer w6: LED2.2@-1950.32,1517.68 R22.1
NetLED3_2: LED3.2 R6.1 | length 63.2
  Top Layer w10: LED3.2 -1128.31,1844.68 R6.1
NetLED4_1: LED4.1 R8.2 | length 79.2
  Top Layer w10: R8.2 -1573.46,2028 LED4.1
NetR2_2: R2.2 R7.2 U4.22 | length 107
  Top Layer w10: R2.2 R7.2 U4.22
NetR3_2: R3.2 R8.1 U4.3 | length 130.7
  Top Layer w10: U4.3 R8.1@-1595.34,2069.02
NetR13_2: R13.2 U6.19 | length 46.3
  Top Layer w10: R13.2 -1760,1480 -1745.32,1494.68 U6.19
NetR37_1: R37.1 U2.44 | length 39
  Top Layer w8: U2.44 R37.1@-2286.53,1267.84
NetR38_2: R38.2 U2.7 | length 94.6
  Top Layer w8: R38.2 -2451.84,1083.16 U2.7
NetU2_15: U2.15 U6.12 U8.12 | length 2587.7
  Top Layer w6: U2.15 -2325.9,926.9 -2254,855 -1366,855 v2(-1303,918) -1281,940 -1281,1019 -1302.31,1040.32 U8.12 ; v2@-1911,1616 v2@-1909.68,1614.68 ; v2(-1909,1614) v2@-1909.68,1614.68 ; U6.12 v2@-1909.68,1614.68
  Bottom Layer w6: v2(-1909,1614) -1909,1620 -1873,1656 -1618,1656 -1264,1302 -1264,957 v2(-1303,918)
NetU2_17: U2.17 U6.13 U8.13 | length 2728.5
  Top Layer w6: U2.17 -2286.53,937.53 -2219,870 -1374,870 v2(-1374,879) ; v2(-1960,1598) -1957,1595 U6.13 ; U8.13 -1304,1060 -1304,1060.35 -1266,1022.35 v2(-1266,912)
  Bottom Layer w6: v2(-1960,1598) -1882,1676 -1617,1676 -1247,1306 -1247,931 v2(-1266,912) -1299,879 v2(-1374,879)
NetU2_25: U2.25 U8.14 | length 968.7
  Top Layer w6: U2.25 -2038.27,984.73 v2@-2028.5,994.5 ; U8.14 -1292.69,1079.68 -1283,1070 v2(-1283,1066)
  Bottom Layer w6: v2(-2029,995) -1333,995 -1283,1045 v2(-1283,1066)
NetU2_30: U2.30 U4.21 | length 1276
  Top Layer w6: U2.30 -1992.84,1083.16 v2(-1975,1101)
  Bottom Layer w6: v2(-2228,2112) -2236,2104 -2236,1471.97 -1992.16,1228.13 -1992.16,1118.16 v2(-1975,1101)
NetU2_31: U2.31 U4.20 | length 1331.3
  Top Layer w6: v2(-2248,2153) -2245.36,2155.64 U4.20 ; U2.31 v2(-2004.16,1102.84)
  Bottom Layer w6: v2(-2248,2153) -2248,1467 -2004.16,1223.16 v2(-2004.16,1102.84)
NetU2_42: U2.42 U6.14 | length 626.6
  Top Layer w6: U2.42 -2247.16,1364.84 -2036.68,1575.32 U6.14
PA11: U2.32
PA12: U2.33
PA13: P2.3 U2.34 | length 348.3
  Top Layer w8: U2.34 -1900.9,1161.9 -1842,1103 P2.3
PA14: P2.2 U2.37 | length 471.5
  Top Layer w6: U2.37@-2147.68,1228.83 U2.37 -2148.73,1249.27 v2(-2129,1269) ; v2(-2025,1141) -1902,1141 -1867.59,1106.59 P2.2
  Bottom Layer w6: v2(-2129,1269) -2076,1269 -2025,1218 v2(-2025,1141)
pwm: R11.2 U2.46 | length 259.9
  Top Layer w10: U2.46 -2325.9,1446.42 R11.2
pads on no net: P2.4 U2.2 U2.3 U2.4 U2.10 U2.11 U2.12 U2.14 U2.16 U2.18 U2.19 U2.20 U2.21 U2.26 U2.29 U2.38 U2.39 U2.40 U2.43 U2.45 U3.4 U4.1 U4.2 U4.4 U4.5 U4.6 U4.7 U4.8 U4.14 U4.15 U4.16 U4.17 U4.18 U4.19 U5.4 U7.4 U8.8 U8.19 U8.20

## Polygon pours and split planes (outlines as drawn)
GND on Top Layer "GND_L01_P006" (solid, remove dead copper, pour order 6): -2706,2801 -2688,2783 -966,2783 -966,743 -1010,699 -1050,739 -2648,739
GND on Bottom Layer "GND_L02_P008" (solid, remove dead copper, pour order 8): -2735,2772 -868,2772 -861,2765 -948,2678 -948,750 -2717,750 -2746,779

## Keep-outs
Keep-Out Layer:
  lines w5: -1077,889 -1126,840 -2556,840 -2605,889 -2605,2669 -2565,2709 -1120,2709 -1077,2666 -1077,889 ; -1077,889 -1077,889

## Silkscreen, mask and mechanical layers (free items; w line width, h text height)
Top Overlay:
  text "GPS" at -1577,2122 h39.37
  text "MAIN" at -1259,1877 h39.37
  text "LOCK" at -2205,1425 h39.37
  text "DIV" at -1244,1329 h39.37
Bottom Solder:
  rectangle: -1236,955 -1075,1238
  rectangle: -1264,1501 -1076,1784